# EAGLE board DS18B20_Filter (EAGLE 6.5.0)
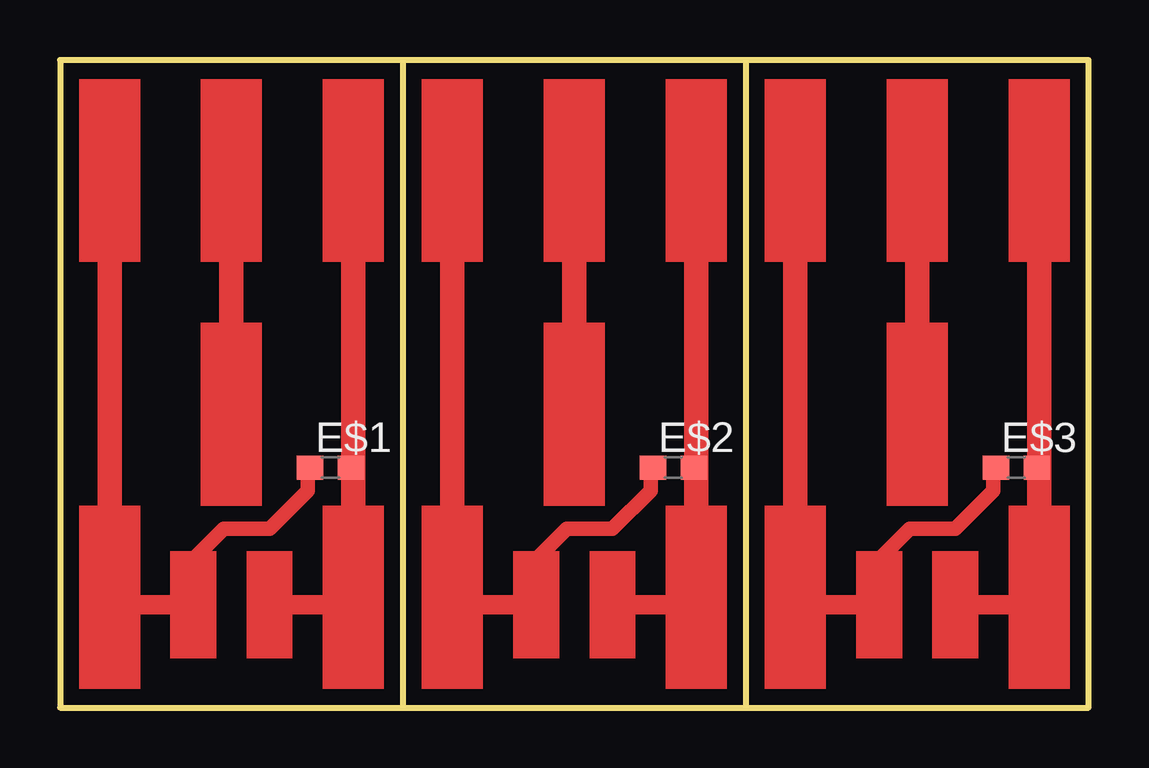
[diagram p0: board, top side]

Size 42.86 x 26.99 mm. Coordinates in mm from the lower left corner, seen from the top.
Outline: 14.29,0 0,0 0,26.99 14.29,26.99
Outline: 14.29,0 28.57,0
Outline: 28.57,26.99 14.29,26.99
Outline: 14.29,26.99 14.29,0
Outline: 28.57,0 42.86,0 42.86,26.99 28.57,26.99
Outline: 28.57,26.99 28.57,0
Copper layers (1*16): Top 0.035mm / dielectric 1.5mm / Bottom 0.035mm
Design rules "default": minimum track width 12mil, minimum drill 32mil, track to track 12mil, track to pad 12mil, pad to pad 12mil, via to via 12mil, smd to smd 8mil, copper to edge 40mil, drill to drill 8mil, minimum pad ring 16mil, minimum via ring 12mil, stop-mask expansion 4mil, vias tented up to drill 0mil, thermal gap 20mil

## Footprints (pad centres in the part's own frame; a part is rotated, then mirrored left to right if it is on the bottom)
C0603 = smd 1.1 x 1: 1 -0.85,0; 2 0.85,0

## Placement (x,y rotation side)
E$1  [C0603]  11.27,10 0 top
E$2  [C0603]  25.56,10 0 top
E$3  [C0603]  39.85,10 0 top

## Library data of the parts
E$1-E$3 = rcl

## Tracks (layer width: path | path; a pad name or v marks a point on that pad's centre or on a via)
S$1
  Top 0.813: 8.73,4.29 12.22,4.29
S$2
  Top 1.016: 12.22,6.51 12.22,19.84
S$3
  Top 1.016: 2.06,7.14 2.06,19.53
S$4
  Top 0.61: 10.32,10 10.32,9.05 8.73,7.46 6.83,7.46 5.56,6.19 5.56,4.29
  Top 0.813: 5.56,4.29 2.06,4.29
S$5
  Top 1.016: 7.14,15.08 7.14,20.48
S$6
  Top 0.813: 23.02,4.29 26.51,4.29
S$7
  Top 0.61: 24.61,10 24.61,9.05 23.02,7.46 21.11,7.46 19.84,6.19 19.84,4.29
  Top 0.813: 19.84,4.29 16.35,4.29
S$8
  Top 1.016: 26.51,6.51 26.51,19.84
S$9
  Top 1.016: 16.35,7.14 16.35,19.53
S$10
  Top 1.016: 21.43,15.08 21.43,20.48
S$11
  Top 0.813: 37.31,4.29 40.8,4.29
S$12
  Top 0.61: 38.89,10 38.89,9.05 37.31,7.46 35.4,7.46 34.13,6.19 34.13,4.29
  Top 0.813: 34.13,4.29 30.64,4.29
S$13
  Top 1.016: 40.8,6.51 40.8,19.84
S$14
  Top 1.016: 30.64,7.14 30.64,19.53
S$15
  Top 1.016: 35.72,15.08 35.72,20.48
(copper drawn outside any net)
  shapes: Top area x24